# Altium PCB 分电板V2.PcbDoc (part 2 of 2)
Units mil, origin at the board's own origin, x right, y up, seen from the top; angles counter-clockwise.
Board outline 3149.61 x 2362.21 mil, 4 copper layers (Top Layer, GND, POWER, Bottom Layer), stack 23.756 mil thick; 196 components, 158 nets, 590 pads, 320 vias.
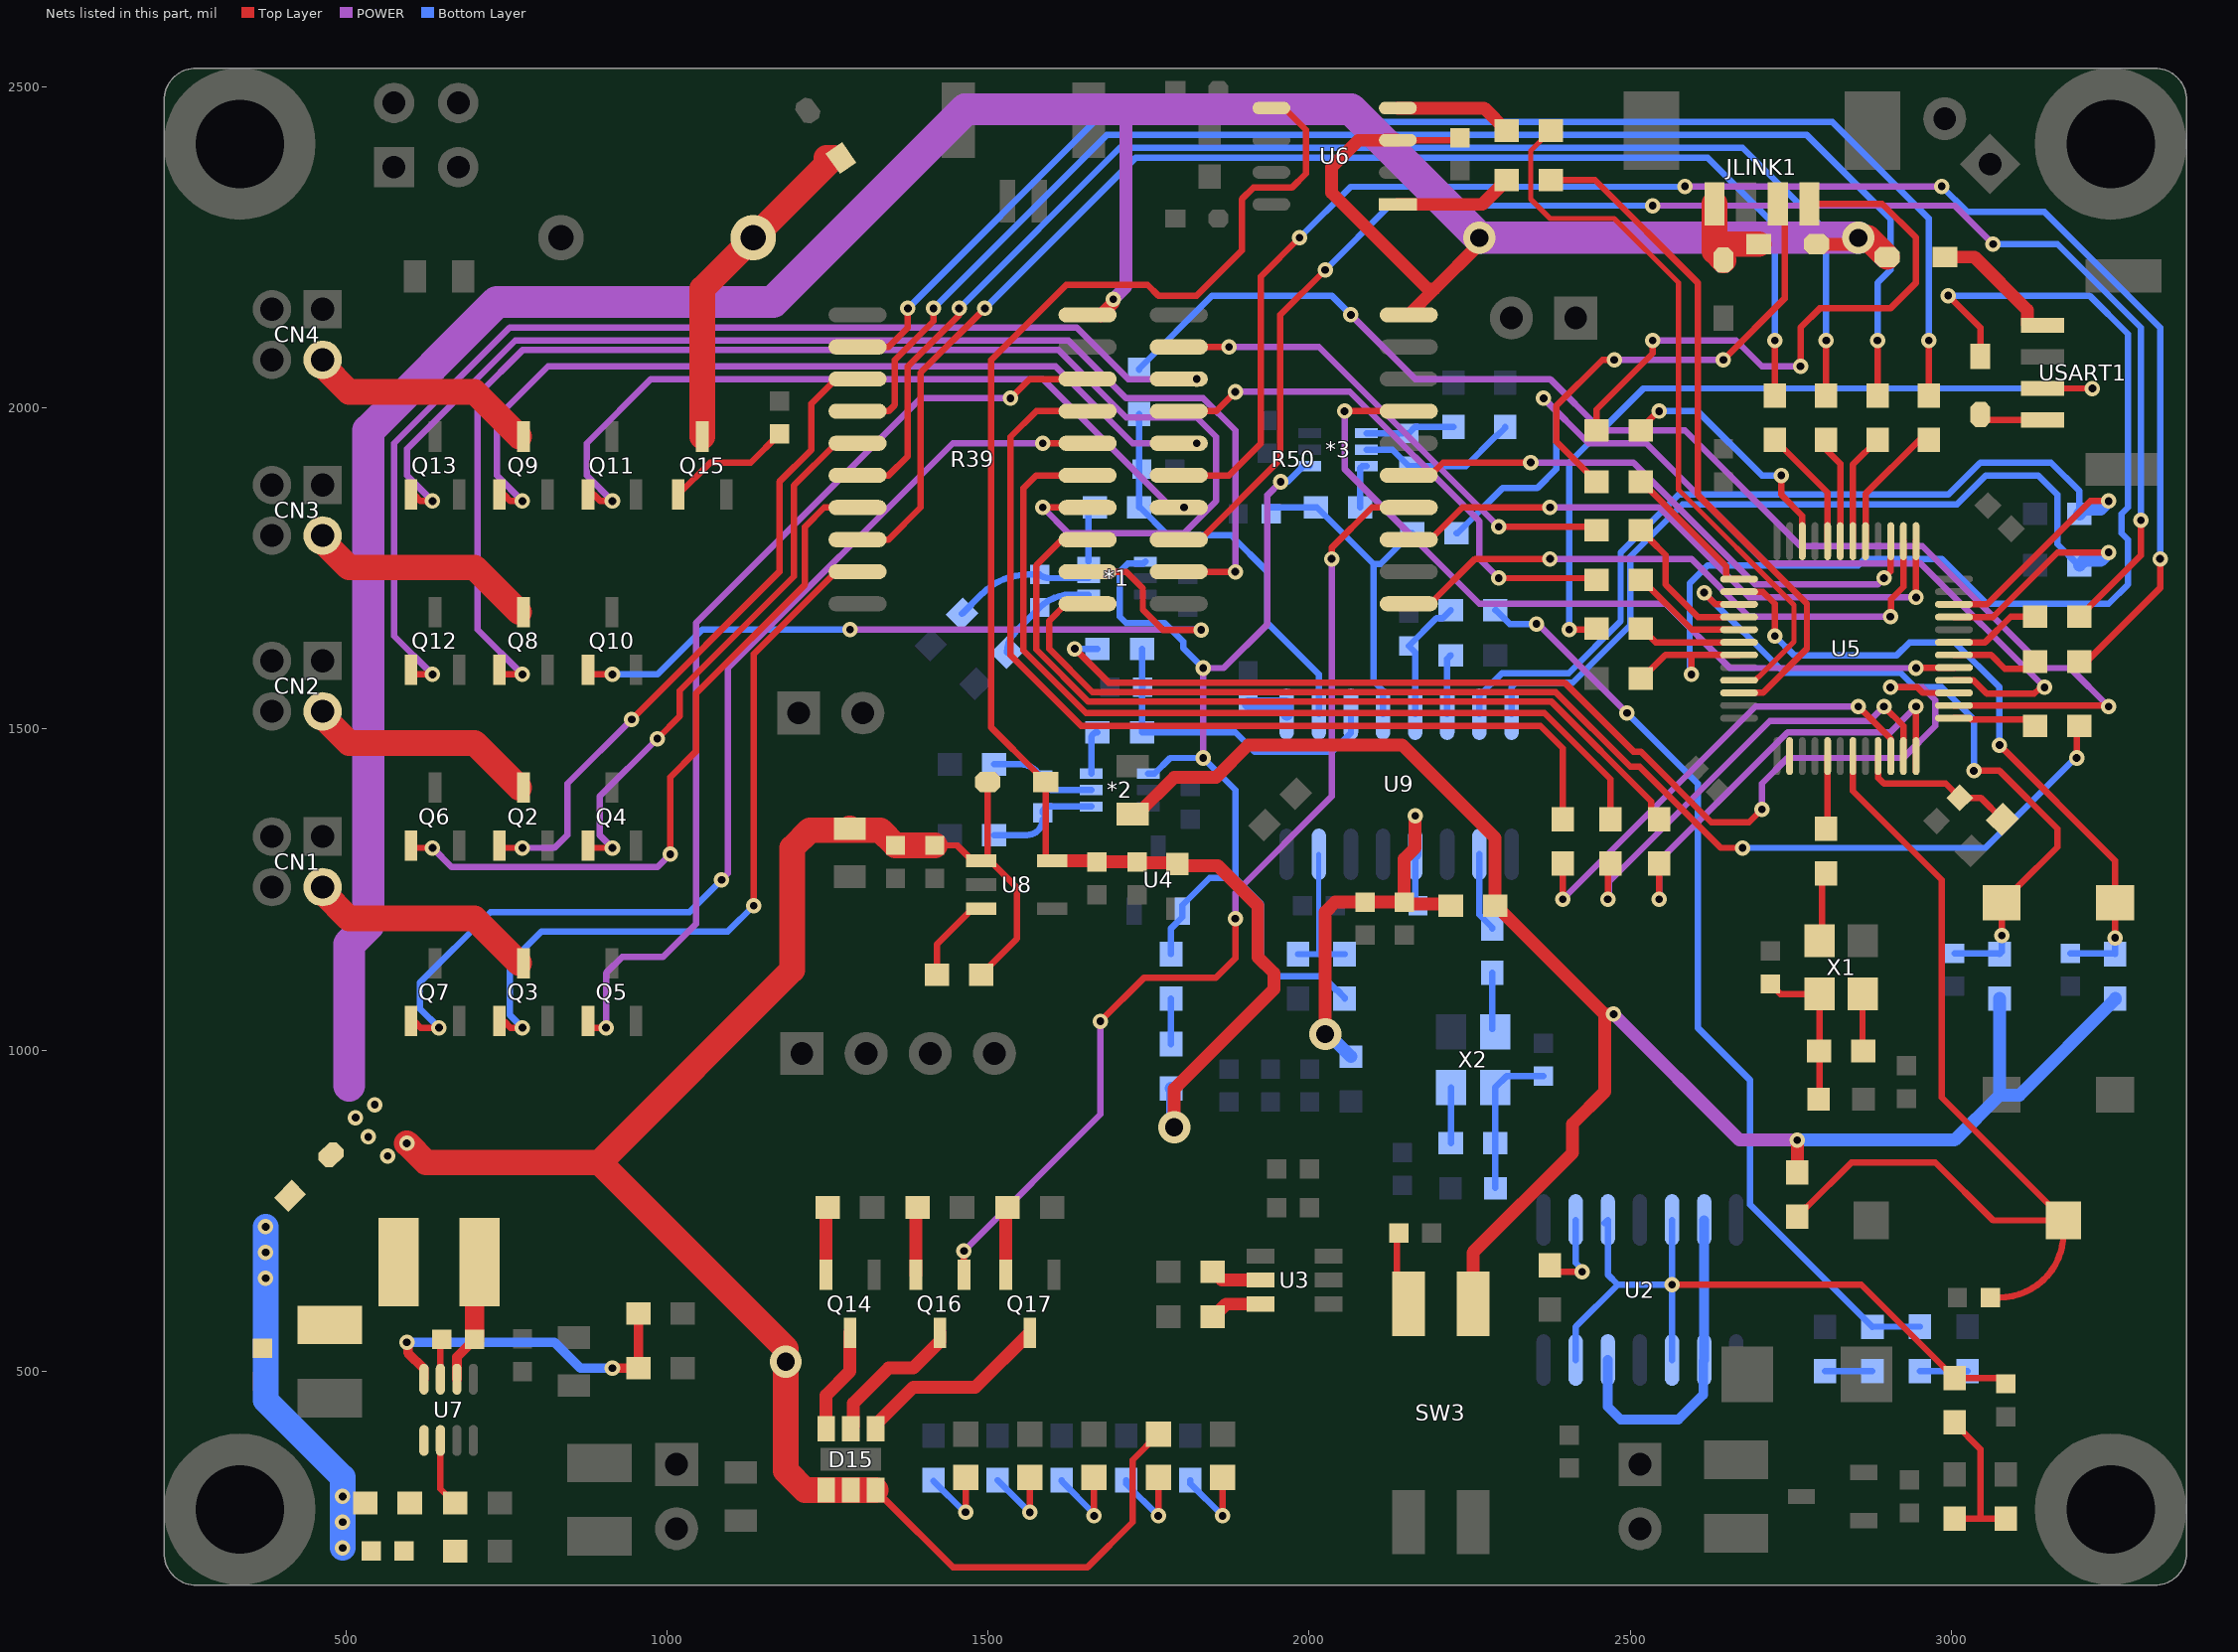
[diagram p4: the nets of this part, all layers, seen from the top]

## Via types
v1: diameter 24, hole 12, Top Layer to Bottom Layer, tented both sides, 277 vias
v2: diameter 34, hole 22, Top Layer to Bottom Layer, tented both sides, 32 vias
v3: diameter 50/50/50 (per signal layer), hole 28, Top Layer to Bottom Layer, tented both sides, 11 vias

## Nets (pads, with @x,y where several pads share a name; then routed paths per layer and width w, separated by ;. In a path a pad name is that pad's centre, name@x,y a point inside that pad or via, vN(x,y) a via of type N, cw(c..) or ccw(c..) an arc to the next point about the centre after c; other vN are vias at no path point) (continued)
MCU3V3: C36.1 C37.1 C38.1 D7.1 L4.2 R9.1 R63.1 R64.2 R65.2 SW3.1 U6.5 U8.5 VDD.1 | length 5214.6
  Top Layer w10: U8.5@1599.71,1295.05 1594.44,1295.05 1589.6,1299.89 D7.1@1589.6,1417.65 1585.66,1417.65 1574.91,1428.4 1574.91,1432.33 1505,1502.25 1505,2075 1621.81,2191.81 1748.19,2191.81 1765,2175 1825,2175 1895,2245 1895,2325 1913,2343 1973,2343 1995,2365 1995,2432.74 1960.82,2466.93 U6.5@1941.13,2466.93 ; VDD.1@2289.5,1225 VDD.1@2302,1212.5
  Top Layer w20: U8.5@1599.71,1295.05 1599.87,1294.89 1669.59,1294.89 1671.24,1293.24 1730.24,1293.24 1731.89,1294.89 1735.16,1291.62 1793.38,1291.62 L4.2@1795,1290 1800,1285 1802.5,1287.5 1857.5,1287.5 1920,1225 1920,1145 1945,1120 1945,1095 1790,940 v3(1790,880) ; C38.1@1725,1367.6 1732.5,1367.6 1789.91,1425 1855,1425 1905,1475 2145,1475 2289.5,1330.5 VDD.1@2289.5,1225 2291,1225 2460,1056 ; SW3.1@2255,605 2255,685 2410,840 2410,885 2460,935 2460,1056 ; v1(2474,1056) 2460,1056 ; R63.1@2752.5,818.5 R63.1@2760,811 ; R63.1@2760,809.5 R63.1@2760,811 ; v1(2760,860) R63.1@2760,811
  POWER w20: v1(2474,1056) 2670,860 v1(2760,860)
  Bottom Layer w20: R9.1@1785,940.5 1787.5,938 1787.5,882.5 v3(1790,880) ; v1(2760,860) 3005,860 3075,930 ; R65.2@3075,1080.5 3075,930 ; R64.2@3255,1080.5 3255,1079 3106,930 3075,930
Net3V3_2: 3V3.2 R33.1 | length 136.2
  Top Layer w10: v1(1865,275) 3V3.2@1865,335
  Bottom Layer w10: R33.1@1815,330.5 1815,325 v1(1865,275)
Net5V_2: 5V.2 R55.1 | length 136.1
  Top Layer w10: v1(1765,275) 5V.2@1765,335
  Bottom Layer w10: R55.1@1715.25,330.5 1715.25,324.75 v1(1765,275)
Net12V_2: 12V.2 R5.2 | length 136.4
  Top Layer w10: v1(1665,275) 12V.2@1665,334.99
  Bottom Layer w10: R5.2@1614.5,330.5 1614.5,329 1665,278.5 v1(1665,275)
Net24_ON_2: 24.2 R11.2 | length 125.8
  Top Layer w10: v1(1565,280.25) 24.2@1565,335
  Bottom Layer w10: R11.2@1514.75,330.5 v1(1565,280.25)
Net48V_2: 48V.2 R26.2 | length 124.6
  Top Layer w10: v1(1465,280.5) 48V.2@1465,335
  Bottom Layer w10: R26.2@1415,329 1463.5,280.5 v1(1465,280.5)
Net*1_4: *1.4 C14.1 R13.1 | length 170.4
  Bottom Layer w10: R13.1@1529.4,1619.4 cw(c1574.54,1619.4) 1542.6,1651.3 C14.1@1580.71,1689.41 cw(c1629,1641.11) 1629,1709.41 *1.4@1656.42,1709.41
Net*1_5: *1.5 C14.2 R12.1 | length 219.6
  Bottom Layer w10: R12.1@1459.4,1679.4 1491.3,1711.3 cw(c1562.01,1640.59) 1562.01,1740.59 C14.2@1580.71,1740.59 ccw(c1594.19,1754.08) 1594.19,1735 *1.5@1656.42,1735
Net*1_6: *1.6 R76.1 | length 88.5
  Bottom Layer w10: *1.6@1656.42,1760.59 1656.42,1835.21 R76.1@1666.21,1845
Net*2_4: *2.4 C15.1 R73.1 | length 170.8
  Bottom Layer w10: R73.1@1509.5,1335 1560.59,1335 ccw(c1560.59,1359.41) C15.1@1585,1359.41 ; C15.1@1585,1369.41 cw(c1595,1369.41) 1595,1379.41 *2.4@1660.71,1379.41
Net*2_5: *2.5 C15.2 R14.1 | length 179.7
  Bottom Layer w10: R14.1@1509.5,1445 1550.58,1445 cw(c1550.58,1410.59) C15.2@1585,1410.59 ; C15.2@1585,1420.59 ccw(c1600.58,1420.59) 1600.58,1405 *2.5@1660.71,1405
Net*2_6: *2.6 R77.1 | length 70
  Bottom Layer w10: *2.6@1660.71,1430.59 1660.71,1485.21 cw(c1670.5,1485.21) R77.1@1670.5,1495
Net*3_4: *3.4 C46.1 R75.1 | length 139.8
  Bottom Layer w10: *3.4@2089.29,1960.59 C46.1@2155,1960.59 2164.91,1970.5 R75.1@2225,1970.5
Net*3_5: *3.5 C46.2 R74.1 | length 252.5
  Bottom Layer w10: *3.5@2089.29,1935 2129.42,1935 C46.2@2155,1909.41 2243.91,1909.41 2291,1956.5 2292.5,1956.5 2305,1969 R74.1@2305,1970.5
Net*3_6: *3.6 R78.1 | length 72.5
  Bottom Layer w10: R78.1@2079.5,1845 2079.5,1906.54 2082.37,1909.41 *3.6@2089.29,1909.41
NetBUZZER1_2: BUZZER1.2 D13.1 Q15.3 | length 530.5
  Top Layer w40: Q15.3@1055,1955.38 1055,2185.79 1129.21,2260 D13.1@1258.35,2389.14 ; 1248.35,2389.14 D13.1@1258.35,2389.14 ; D13.1@1260.81,2389.14 D13.1@1258.35,2389.14
NetC9_2: C9.2 R15.2 R16.1 U7.1
NetC11_2: C11.2 L1.1 R17.2 X1.4 | length 247.4
  Top Layer w10: C11.2@2718.17,1103.16 2733.92,1087.41 2794.7,1087.41 2794.7,925.28 L1.1@2793.17,923.75
NetC18_1: C18.1 L2.1 U7.6 | length 196.9
  Top Layer w15: U7.6@672.8,487.7 672.8,522.21 C18.1@700.59,550
  Top Layer w30: C18.1@700.59,550 700.59,662.6 L2.1@707.99,670
NetC18_2: C18.2 U7.7 | length 63.2
  Top Layer w10: U7.7@647.2,487.7 647.2,547.79 C18.2@649.41,550
NetC25_2: C25.2 L3.1 R27.2 X2.4 | length 239
  Bottom Layer w10: L3.1@2289.45,785.55 X2.4@2289.45,941.69 2307.17,959.41 C25.2@2365,959.41
NetC39_2: C39.2 U9.1 | length 75.7
  Bottom Layer w20: C39.2@1905,1539.41 1963.8,1539.41 1965,1538.21 U9.1@1965,1523.04
NetC50_1: C50.1 R8.1 U9.5 | length 199
  Bottom Layer w10: U9.5@2165,1523.04 2165,1619.4 C50.1@2155,1629.41 2198.09,1672.5 2208,1672.5 R8.1@2220.5,1685
NetD14_2: D14.2 USART1.4 | length 105.8
  Top Layer w10: D14.2@3045,1990 3045,1981.2 USART1.4@3142.01,1981.2
NetD15_2: D15.2 Q17.3 | length 305.3
  Top Layer w20: D15.2@1325,410.67 1325,416.57 1383.43,475 1480,475 Q17.3@1565,560
NetD15_4: D15.4 Q16.3 | length 229.3
  Top Layer w20: D15.4@1286.42,410.67 1290.2,414.45 1290.2,450.2 1345,505 1383.46,505 1425,546.54 Q16.3@1425,560
NetD15_6: D15.6 Q14.3 | length 164.7
  Top Layer w20: D15.6@1247.83,410.67 1247.83,462.89 1285,500.06 Q14.3@1285,560
NetJLINK1_1: JLINK1.1 R42.2 | length 949.9
  Top Layer w10: R42.2@2447.5,1965 2447.5,1997.5 2535,2085 v1(2535,2105) ; v1(2765,2065) 2765,2125 2795,2155 2905,2155 2945,2195 2945,2265 2892.09,2317.91 JLINK1.1@2778.82,2317.91
  POWER w10: v1(2535,2105) 2665,2105 2705,2065 v1(2765,2065)
NetJLINK1_2: JLINK1.2 R38.2 | length 721.6
  Top Layer w10: R38.2@2447.5,1885 2446,1885 2433.5,1897.5 2433.5,1899 2385,1947.5 2385,2003.18 2456.82,2075 v1(2475,2075) ; v1(2645,2075) 2740.36,2170.36 2740.36,2307.17 JLINK1.2@2729.61,2317.91
  POWER w10: v1(2475,2075) v1(2645,2075)
NetQ14_2: Q14.2 R66.2 | length 106.2
  Top Layer w20: Q14.2@1247.6,650 1247.76,650.16 1247.76,752.26 R66.2@1250.5,755
NetQ15_1: Q15.1 R_BEEP.2 | length 196.3
  Top Layer w10: Q15.1@1017.6,1865.38 1067.22,1915 1130.58,1915 R_BEEP.2@1175,1959.41
NetQ16_2: Q16.2 R67.2 | length 106.2
  Top Layer w20: Q16.2@1387.6,650 1387.76,650.16 1387.76,752.26 R67.2@1390.5,755
NetQ17_2: Q17.2 R68.2 | length 106.2
  Top Layer w20: Q17.2@1527.6,650 1527.76,650.16 1527.76,752.26 R68.2@1530.5,755
NetR4_2: R4.2 U2.2 | length 138.8
  Top Layer w10: R4.2@2375,665 2385,655 v1(2425,655)
  Bottom Layer w10: U2.2@2415,735.56 2415,668.79 2425,658.79 v1(2425,655)
NetR6_2: R6.2 U3.2 | length 79.9
  Top Layer w20: R6.2@1849.5,655 1851,655 1863.98,642.02 U3.2@1924.04,642.02
NetR7_2: R7.2 U3.3 | length 82.7
  Top Layer w20: R7.2@1849.5,585 1851,585 1870.62,604.62 U3.3@1924.04,604.62
NetR8_2: R8.2 R51.2 R53.2 | length 1460.2
  POWER w10: v1(2353.75,1663.75) 2356.25,1663.75 v1(2495,1525)
  Bottom Layer w10: R8.2@2289.5,1685 2291,1685 2312.25,1663.75 v1(2353.75,1663.75) ; v1(2495,1525) 2605,1415 2605,1035 2686.8,953.2 2686.8,759.2 R53.2@2877,569 2877.5,569.5 R51.2@2951,569.5
NetR9_2: R9.2 R10.1 | length 71
  Bottom Layer w10: R9.2@1785,1009.5 R10.1@1785,1080.5
NetR17_1: R17.1 X1.1 | length 89.1
  Top Layer w10: X1.1@2861.63,1087.41 2861.63,999.78 R17.1@2862.67,998.75
NetR18_2: R18.2 R19.1 U7.8 | length 530.4
  Top Layer w15: v1(595,545) 596.72,543.28 596.72,528.78 621.6,503.9 U7.8@621.6,487.7 ; v1(915,505) R19.1@955.5,505 R18.2@955.5,590
  Bottom Layer w15: v1(595,545) 825,545 865,505 v1(915,505)
NetR20_2: R20.2 U6.1 | length 185.3
  Top Layer w20: U6.1@2137.98,2316.93 2269.43,2316.93 R20.2@2307.5,2355
NetR21_1: R21.1 X1.3 | length 96.2
  Top Layer w10: X1.3@2794.7,1170.09 2793.67,1171.12 2798.67,1176.12 R21.1@2798.67,1263.75
NetR24_2: R24.2 U6.4 | length 184
  Top Layer w20: U6.4@2137.98,2466.93 2272.46,2466.93 R24.2@2307.5,2431.88
NetR25_1: R25.1 U7.2 | length 107.8
  Top Layer w10: U7.2@647.2,392.3 647.2,316.8 669,295 R25.1@670.5,295
NetR27_1: R27.1 X2.1 | length 86.6
  Bottom Layer w10: R27.1@2220.55,855.05 X2.1@2220.55,941.69
NetR29_1: R29.1 X2.3 | length 87.7
  Bottom Layer w10: X2.3@2285,1032.76 R29.1@2285,1120.5
NetR35_2: R35.2 R35B.1 U9.15 | length 229.4
  Bottom Layer w8: U9.15@2015,1305 2015,1153.38 2018.88,1149.5
  Bottom Layer w10: R35B.1@1982.75,1149.5 2018.88,1149.5 R35.2@2055,1149.5
NetR41_2: R41.2 U8.3 | length 139.4
  Top Layer w10: R41.2@1420.1,1117.65 1420.1,1164.64 1475.7,1220.25 U8.3@1489.48,1220.25
NetR48_1: R48.1 R51.1 | length 74
  Bottom Layer w10: R51.1@2951,500.5 R48.1@3025,500.5
NetR53_1: R53.1 R56.1 | length 74
  Bottom Layer w10: R56.1@2803,500 R53.1@2877,500
NetR58_2: R58.2 U9.6 | length 94.2
  Bottom Layer w10: U9.6@2215,1523.04 2215,1609.5 R58.2@2220.5,1615
NetR70_1: R70.1 SW3.2 | length 69.7
  Top Layer w10: SW3.2@2136.69,647.99 R70.1@2136.69,717.71
NetR72_1: R72.1 USART1.3 | length 1243.2
  Top Layer w10: v1(2405,1655) 2445.85,1655 R72.1@2447.5,1656.65 ; USART1.3@3142.01,2030.39 v1(3219.6,2030.39)
  Bottom Layer w10: v1(2405,1655) 2405,1915 2520.4,2030.39 v1(3219.6,2030.39)
NetU2_6: U2.6 U2.9 U2.12 | length 517.9
  Bottom Layer w15: U2.12@2465,517.52 2465,445 2485,425 2575,425 2613.55,463.55 2613.55,516.07 U2.9@2615,517.52 U2.6@2615,735.56
NRST: C44.1 R63.2 RST1.1 U5.7 | length 1546.3
  Top Layer w10: R63.2@2760,740.5 2760,742 2772.5,754.5 2774,754.5 2844.5,825 2975,825 3065,735 RST1.1@3174.6,735 ; U5.7@2846.58,1457.91 2846.58,1403.42 2985,1265 2985,926.57 3174.6,736.97 RST1.1@3174.6,735 ; C44.1@3060.59,615 3074.6,615 ccw(c3074.6,715) 3174.6,715 RST1.1@3174.6,735 ; RST1.1@3180.1,729.5 cw(c3180.1,735) RST1.1@3174.6,735
OSC_8M: R29.2 U9.10 | length 123.8
  Bottom Layer w10: U9.10@2265,1305 2265,1211 2285,1191 R29.2@2285,1189.5
OSC_12M: R21.2 U5.5 | length 114.7
  Top Layer w10: R21.2@2805,1344.5 ccw(c2805,1346.71) 2807.21,1346.71 U5.5@2807.21,1457.91
PA0: R44.1 U5.10 | length 738.1
  Top Layer w10: v1(2395,1235) R44.1@2395,1290.5 ; v1(2855,1535) 2855.43,1535 2905.64,1484.8 U5.10@2905.64,1457.91
  POWER w10: v1(2395,1235) 2695,1535 v1(2855,1535)
PA1: R45.1 U5.11 | length 715.7
  Top Layer w10: v1(2465,1235) 2465,1286.43 R45.1@2469.07,1290.5 ; v1(2895,1535) 2925.32,1504.68 U5.11@2925.32,1457.91
  POWER w10: v1(2465,1235) 2467,1237 2467,1262 2717.5,1512.5 2872.5,1512.5 v1(2895,1535)
PA2: R47.1 U5.12 | length 716.2
  Top Layer w10: v1(2545,1235) R47.1@2545,1290.5 ; U5.12@2945.01,1433.7 U5.12@2945.01,1457.91 v1(2945,1535)
  POWER w10: v1(2545,1235) 2545,1295 2745,1495 2905,1495 v1(2945,1535)
PA3: R49.1 U5.13 | length 127.3
  Top Layer w10: U5.13@3004.06,1516.96 3028.44,1516.96 3030.4,1515 R49.1@3130.5,1515
PA4: R30.1 U5.14 | length 2064.8
  Top Layer w10: U5.14@3004.06,1536.65 v1@3245,1536.65
  POWER w10: v1(2065,2145) 2165,2045 2375,2045 2455,1965 2585,1965 2765,1785 2955,1785 3145,1595 3185,1595 v1(3245,1535)
  Bottom Layer w10: R30.1@1735,2059.5 1735,2061 1849,2175 2035,2175 v1(2065,2145)
PA5: R32.1 U5.15 | length 1793.8
  Top Layer w10: v1(1635,1625) 1687.5,1572.5 2397.5,1572.5 2505,1465 2516.21,1465 2626.21,1355 2685,1355 v1(2705,1375) ; v1(2905,1565) 2946.82,1565 2955.49,1556.33 U5.15@3004.06,1556.33
  POWER w10: v1(2705,1375) 2705,1415 2745,1455 2925,1455 2975,1505 2975,1545 2955,1565 v1(2905,1565)
  Bottom Layer w10: v1(1635,1625) R32.1@1670.5,1625
PA6: R37.1 U5.16 | length 1440.5
  Top Layer w10: U5.16@3004.06,1576.02 3004.18,1575.9 3034.1,1575.9 3055,1555 3129.02,1555 3136.34,1562.32 3138.53,1562.32 3139.02,1562.81 3139.02,1565 v1(3145,1565) v1@3145,1568.79
  POWER w10: v1(2365,2015) 2435,1945 2525,1945 2712.5,1757.5 2952.5,1757.5 v1(3145,1565)
  Bottom Layer w10: R37.1@2229.5,1805 2231,1805 2301,1875 2355,1875 2385,1905 2385,1995 v1(2365,2015)
PA7: R50.17 U5.17 | length 1267.8
  Top Layer w10: v1(2055,1995) R50.17@2155,1995 ; v1(2945,1595) 2945.58,1595.58 3003.93,1595.58 U5.17@3004.06,1595.7
  POWER w10: v1(2055,1995) 2055,1905 2265,1695 2555,1695 2655,1595 v1(2945,1595)
PA8: R31.1 U5.29 | length 207.3
  Top Layer w10: U5.29@2866.27,1792.55 2866.39,1792.67 2866.39,1866.39 2950.5,1950.5 R31.1@2965,1950.5
PA9: R36.1 U5.30 | length 173.9
  Top Layer w10: U5.30@2846.58,1792.55 2846.58,1912.08 R36.1@2885,1950.5
PA10: R40.1 U5.31 | length 167
  Top Layer w10: R40.1@2805,1950.5 2805,1935 2826.9,1913.1 U5.31@2826.9,1792.55
PA11: R43.1 U5.32 | length 192
  Top Layer w10: R43.1@2725,1950.5 2807.21,1868.29 U5.32@2807.21,1792.55
PA13_SWDIO: R42.1 U5.34 | length 391.4
  Top Layer w10: R42.1@2516.5,1965 2515,1966.5 2543.5,1995 v1(2544.94,1995) ; v1(2735,1895) 2735,1865 2767.84,1832.16 U5.34@2767.84,1792.55
  Bottom Layer w10: v1(2544.94,1995) 2605,1995 2705,1895 v1(2735,1895)
PA14_SWCLK: R38.1 U5.37 | length 228.8
  Top Layer w10: R38.1@2516.5,1886.3 2518,1886.3 2530.5,1873.8 2530.5,1872.42 2649.1,1753.82 2649.1,1733.79 2649.39,1733.5 U5.37@2669.42,1733.5
PA15: C43.1 R64.1 SW1.1 U5.38 | length 1073.6
  Top Layer w10: U5.38@2669.42,1713.81 2669.54,1713.69 2706.31,1713.69 2725,1695 v1(2725,1645) ; v1(3075,1475) 3255,1295 SW1.1@3255,1229.76 v1(3255,1175)
  Bottom Layer w10: v1(2725,1645) 2755,1615 2915,1615 2935,1635 3005,1635 3075,1565 v1(3075,1475) ; C43.1@3185,1150.59 3253.91,1150.59 R64.1@3255,1149.5 v1(3255,1175)
PB0: R57.1 U5.18 | length 135.3
  Top Layer w10: U5.18@3004.06,1615.39 3061.77,1615.39 3083.16,1594 R57.1@3130.5,1594
PB1: R59.1 U5.19 | length 143
  Top Layer w10: U5.19@3004.06,1635.07 3052.5,1635.07 3092.43,1675 R59.1@3130.5,1675
PB3: C42.1 R65.1 SW2.1 U5.39 | length 1116
  Top Layer w10: v1(2615,1712.37) 2633.24,1694.13 U5.39@2669.42,1694.13 ; v1(3035,1435) 3075,1435 3165,1345 3165,1316.39 3102.89,1254.29 3102.89,1252.32 3080.34,1229.76 SW2.1@3078.37,1229.76 v1(3078.37,1178.37)
  Bottom Layer w10: v1(2615,1712.37) 2739.87,1587.5 2920.68,1587.5 2943.18,1565 2985,1565 3035,1515 v1(3035,1435) ; C42.1@3005,1150.59 R65.1@3076.09,1150.59 ; R65.1@3075,1149.5 R65.1@3076.09,1150.59 ; v1(3078.37,1178.37) 3078.37,1152.87 R65.1@3076.09,1150.59
PB4: R52.1 U5.40 | length 236.6
  Top Layer w10: R52.1@2516.5,1809.42 2518,1809.42 2530.5,1796.92 2530.5,1795.42 2555,1770.92 2555,1725 2605.56,1674.44 U5.40@2669.42,1674.44
PB5: R54.1 U5.41 | length 185.1
  Top Layer w10: R54.1@2516.5,1732.54 2518,1732.54 2595.78,1654.76 U5.41@2669.42,1654.76
PB8_CAN_RX: R24.1 U5.45 | length 1148.6
  Top Layer w8: R24.1@2376.5,2431.88 2375,2431.88 2361.5,2418.38 2361.5,2416.88 2345,2400.38 2345,2325 2375,2295 2475,2295 2575,2195 2575,1873.08 2755,1693.08 2755,1636.12 2699.76,1580.88 2699.2,1580.88 2694.34,1576.02 U5.45@2669.42,1576.02
PB9_CAN_TX: R20.1 U5.46 | length 1069.4
  Top Layer w10: R20.1@2376.5,2355 2445,2355 2605,2195 2605,1865 2775,1695 2775,1625 2706.45,1556.45 2669.54,1556.45 U5.46@2669.42,1556.33 U5.46@2669.29,1556.21
PB12: R50.13 U5.25 | length 956.3
  Top Layer w10: R50.13@2155,1795 2188.46,1795 2238.46,1845 v1(2375,1845) ; v1(2945,1705) U5.25@2945.01,1792.55
  POWER w10: v1(2375,1845) 2545,1845 2685,1705 v1(2945,1705)
PB13: R50.11 U5.26 | length 942.2
  Top Layer w10: R50.11@2155,1695 2188.46,1695 2258.46,1765 v1(2375,1765) ; v1(2905,1675) 2905.97,1675.97 2905.97,1702 2925.32,1721.34 U5.26@2925.32,1792.55
  POWER w10: v1(2375,1765) 2595,1765 2685,1675 v1(2905,1675)
PB14: R50.15 U5.27 | length 893.1
  Top Layer w10: R50.15@2155,1895 2188.46,1895 2208.46,1915 v1(2345,1915) ; v1(2895,1735) 2905.51,1745.51 2905.51,1792.43 U5.27@2905.64,1792.55
  POWER w10: v1(2345,1915) 2505,1915 2695,1725 2885,1725 v1(2895,1735)
PC13: U5.2
R_A: CN2.3 Q2.3 | length 352.3
  Top Layer w40: CN2.3@463.74,1519.59 505,1478.33 700.45,1478.33 Q2.3@770.07,1408.71
R_B: CN1.3 Q3.3 | length 352.3
  Top Layer w40: CN1.3@463.74,1246.26 505,1205 700.45,1205 Q3.3@770.07,1135.38
R_C: CN3.3 Q8.3 | length 352.3
  Top Layer w40: CN3.3@463.74,1792.93 505,1751.67 700.45,1751.67 Q8.3@770.07,1682.04
R_D: CN4.3 Q9.3 | length 361
  Top Layer w40: CN4.3@463.74,2075 463.74,2066.26 505,2025 700.45,2025 Q9.3@770.07,1955.38
RED: Q16.1 R50.14 | length 1580.9
  Top Layer w10: Q16.1@1462.4,650 v1(1462.4,687.6) ; v1(1675,1045) 1742.5,1112.5 1854.32,1112.5 1885,1143.18 v1(1885,1205) ; v1(2035,1765) 2035,1782.24 2097.76,1845 R50.14@2155,1845
  POWER w10: v1(1462.4,687.6) 1675,900.2 v1(1675,1045) ; v1(1885,1205) 1885,1245 2035,1395 v1(2035,1765)
SCL: R62.2 U5.21 U9.8 | length 1565.3
  Top Layer w10: U5.21@3004.06,1674.44 3064.44,1674.44 3165,1775 v1(3245,1775)
  Bottom Layer w10: U9.8@2315,1523.04 2315,1565 2322,1572 2410.18,1572 2500,1661.82 2500,1768.79 2581.21,1850 3008.7,1850 3053.7,1895 3135,1895 3165,1865 3165,1788 3198,1755 R62.2@3199.5,1755
  Bottom Layer w20: R62.2@3199.5,1755 3207,1762.5 3232.5,1762.5 v1(3245,1775)
SDA: R61.2 U5.22 U9.7 | length 1591.7
  Top Layer w10: U5.22@3004.06,1694.13 3055.34,1694.13 3216.21,1855 v1(3245,1855)
  Bottom Layer w10: U9.7@2265,1523.04 2265,1551.86 2300.14,1587 2403.97,1587 2485,1668.03 2485,1775 2575,1865 2995,1865 3045,1915 3155,1915 3199.5,1870.5 3199.5,1842.5 R61.2@3199.5,1835
  Bottom Layer w20: R61.2@3199.5,1835 3207,1842.5 3232.5,1842.5 v1(3245,1855)
TIM1_CH1: Q2.1 R39.3 | length 1023.7
  Top Layer w10: Q2.1@746.28,1315 v1(775,1315) ; v1(945,1515) 1175,1745 1175,1885 1225,1935 1225,2006.72 1263.28,2045 R39.3@1296.74,2045
  POWER w10: v1(775,1315) 825,1315 845,1335 845,1415 v1(945,1515)
TIM1_CH1_IN: R31.2 R39.2 | length 2172.2
  Top Layer w10: R39.2@1296.74,2095 1345,2095 1375,2125 v1(1375,2155) v1@1375,2158.79 ; R31.2@2965,2019.5 v1(2965,2105)
  Bottom Layer w10: v1(1375,2155) 1665,2445 2815,2445 2965,2295 v1(2965,2105)
TIM1_CH2: Q4.1 R39.5 | length 853
  Top Layer w10: Q4.1@886.28,1315 v1(915,1315) ; v1(985,1485) 1020,1520 1020,1560 1197.83,1737.83 1197.83,1879.56 1263.28,1945 R39.5@1296.74,1945
  POWER w10: v1(915,1315) 895,1335 895,1395 v1(985,1485)
TIM1_CH2_IN: R36.2 R39.4 | length 2176.7
  Top Layer w10: R39.4@1296.74,1995 1345,1995 1355,2005 1355,2075 1415,2135 v1(1415,2155) ; R36.2@2885,2019.5 v1(2885,2105)
  Bottom Layer w10: v1(1415,2155) 1685,2425 2775,2425 2905,2295 2905,2215 2885,2195 v1(2885,2105)
TIM1_CH3: Q6.1 R39.7 | length 1110.6
  Top Layer w10: Q6.1@606.28,1315 v1(635,1315) ; v1(1005,1305) 1005,1425 1045,1465 1045,1555 1215,1725 1215,1815 1245,1845 R39.7@1296.74,1845
  POWER w10: v1(635,1315) 665,1285 985,1285 v1(1005,1305)
TIM1_CH3_IN: R39.6 R40.2 | length 2116.7
  Top Layer w10: R39.6@1296.74,1895 1345,1895 1375,1925 1375,2065 1455,2145 v1(1455,2155) ; R40.2@2805,2019.5 v1(2805,2105)
  Bottom Layer w10: v1(1455,2155) 1705,2405 2675,2405 2805,2275 v1(2805,2105)
TIM1_CH4: Q3.1 R39.9 | length 1165
  Top Layer w10: Q3.1@746.28,1045 756.28,1035 v1(775,1035) ; v1(1135,1225) 1135,1616.72 1263.28,1745 R39.9@1296.74,1745
  Bottom Layer w10: v1(775,1035) 755,1055 755,1135 805,1185 1095,1185 v1(1135,1225)
TIM1_CH4_IN: R39.8 R43.2 | length 2106.2
  Top Layer w10: R39.8@1296.74,1795 1345,1795 1395,1845 1395,2055 v1(1495,2155) ; R43.2@2725,2019.5 v1(2725,2105)
  Bottom Layer w10: v1(1495,2155) 1729.43,2389.43 2620.57,2389.43 2725,2285 v1(2725,2105)
TIM2_CH1: Q5.1 R39.18 | length 1521.4
  Top Layer w10: Q5.1@876.28,1035 v1(905,1035) ; v1(1535,2015) 1565,2045 R39.18@1655,2045
  POWER w10: v1(905,1035) 905,1120 930,1145 993.7,1145 1045,1196.3 1045,1665 1395,2015 v1(1535,2015)
TIM2_CH1_IN: R39.17 R44.2 | length 1507.1
  Top Layer w10: R39.17@1655,1995 1575,1995 1535,1955 1535,1615 1645,1505 2360,1505 2395,1470 R44.2@2395,1359.5
TIM2_CH2: Q7.1 R39.16 | length 1700.7
  Top Layer w10: Q7.1@606.28,1045 616.28,1035 v1(645,1035) ; v1(1585,1945) R39.16@1655,1945
  POWER w10: v1(1085,1265) 1095,1275 1095,1595 1445,1945 v1(1585,1945)
  Bottom Layer w10: v1(645,1035) 615,1065 615,1105 725,1215 1035,1215 v1(1085,1265)
TIM2_CH2_IN: R39.15 R45.2 | length 1420.4
  Top Layer w10: R39.15@1655,1895 1575,1895 1555,1875 1555,1622.57 1652.57,1525 2366.21,1525 2469.07,1422.14 R45.2@2469.07,1359.5
TIM2_CH3: Q8.1 R39.14 | length 2204.9
  Top Layer w10: Q8.1@746.28,1585 v1(775,1585) ; v1(1585,1845) R39.14@1655,1845
  POWER w10: v1(775,1585) 705,1655 705,2020 775,2090 1610,2090 1715,1985 1825,1985 1855,1955 1855,1855 1805,1805 1625,1805 v1(1585,1845)
TIM2_CH3_IN: R39.13 R47.2 | length 1316.3
  Top Layer w10: R39.13@1655,1795 1615,1795 1575,1755 1575,1623.79 1656.29,1542.5 2377.5,1542.5 2532.5,1387.5 2532.5,1372 R47.2@2545,1359.5
TIM2_CH4: Q10.1 R39.12 | length 1208.7
  Top Layer w10: Q10.1@886.28,1585 v1(915,1585) ; R39.12@1655,1745 1715,1745 1740.96,1719.04 1740.96,1685.76 1772.35,1654.38 v1(1831.84,1654.38)
  POWER w10: v1(1285,1655) 1831.21,1655 v1(1831.84,1654.38)
  Bottom Layer w10: v1(915,1585) 985,1585 1055,1655 v1(1285,1655)
TIM2_CH4_IN: R39.11 R49.2 | length 1962.7
  Top Layer w10: R39.11@1655,1695 1621.54,1695 1595,1668.46 1595,1625 1662.5,1557.5 2383.71,1557.5 2499.87,1441.34 2514.51,1441.34 2640.85,1315 v1(2675,1315) ; v1(3195,1455) 3195,1510.5 R49.2@3199.5,1515
  Bottom Layer w10: v1(2675,1315) 3053.18,1315 3193.18,1455 v1(3195,1455)
TIM3_CH1: Q12.1 R50.3 | length 1808.6
  Top Layer w10: Q12.1@601.43,1592.04 601.43,1589.84 606.28,1585 v1(635,1585) ; R50.3@1796.74,2045 v1(1825,2045)
  POWER w10: v1(635,1585) 575,1645 575,1945 755,2125 1638.11,2125 1718.11,2045 v1(1825,2045)
TIM3_CH1_IN: R50.2 R52.2 | length 769.1
  Top Layer w10: R50.2@1796.74,2095 v1(1875,2095) ; v1(2295,1815) 2441.92,1815 R52.2@2447.5,1809.42
  POWER w10: v1(1875,2095) 2015,2095 v1(2295,1815)
TIM3_CH2: Q9.1 R50.5 | length 1380.5
  Top Layer w10: Q9.1@746.28,1865 756.28,1855 v1(775,1855) ; R50.5@1796.74,1945 v1(1825,1945)
  POWER w10: v1(775,1855) 735,1895 735,1985 815,2065 1605,2065 1725,1945 v1(1825,1945)
TIM3_CH2_IN: R50.4 R54.2 | length 819.3
  Top Layer w10: R50.4@1796.74,1995 1855,1995 v1(1885,2025) ; v1(2295,1735) 2445.04,1735 R54.2@2447.5,1732.54
  POWER w10: v1(1885,2025) 1885.59,2025.59 2063.2,2025.59 2265,1823.79 2265,1765 v1(2295,1735)
TIM3_CH3: Q11.1 R50.7 | length 1202
  Top Layer w10: Q11.1@886.28,1865 896.28,1855 v1(915,1855) ; R50.7@1796.74,1845 v1(1805,1845)
  POWER w10: v1(915,1855) 875,1895 875,1945 975,2045 1585,2045 1785,1845 v1(1805,1845)
TIM3_CH3_IN: R50.6 R57.2 | length 2542
  Top Layer w10: R50.6@1796.74,1895 1875,1895 1925,1945 1925,2205 v1(1985,2265) ; R57.2@3199.5,1594 3201,1594 3213.5,1606.5 3213.5,1608 3325,1719.5 v1(3325,1765)
  POWER w10: v1(2585,2345) v1(2985,2345)
  Bottom Layer w10: v1(1985,2265) 2064.43,2344.43 2584.43,2344.43 v1(2585,2345) ; v1(2985,2345) 3025,2305 3145,2305 3325,2125 v1(3325,1765)
TIM4_CH4: Q13.1 R50.9 | length 1856.8
  Top Layer w10: Q13.1@606.28,1865 616.28,1855 v1(635,1855) ; R50.9@1796.74,1745 v1(1885,1745)
  POWER w10: v1(635,1855) 595,1895 595,1936.21 763.79,2105 1625,2105 1715,2015 1835,2015 1885,1965 v1(1885,1745)
TIM4_CH4_IN: R50.8 R59.2 | length 2414.7
  Top Layer w10: R50.8@1796.74,1795 1830.2,1795 1955,1919.8 1955,2145 v1(2025,2215) ; R59.2@3199.5,1675 3201,1675 3213.5,1687.5 3213.5,1689 3295,1770.5 v1(3295,1825)
  POWER w10: v1(2535,2315) 3005,2315 v1(3065,2255)
  Bottom Layer w10: v1(2025,2215) 2125,2315 v1(2535,2315) ; v1(3065,2255) 3165,2255 3295,2125 v1(3295,1825)
UA: C6.1 R30.2 R76.2 U9.2 | length 641.9
  Bottom Layer w10: R30.2@1735,1990.5 1735.21,1990.29 R76.2@1735.21,1845 1736.71,1845 1779.8,1801.91 1878.09,1801.91 1935,1745 1935,1665 2015,1585 U9.2@2015,1523.04
UB: C7.1 R32.2 R77.2 U9.3 | length 510.1
  Bottom Layer w10: R32.2@1739.5,1625 1739.5,1566.09 ccw(c1740.59,1566.09) C7.1@1740.59,1565 ccw(c1740.59,1563.9) 1739.5,1563.9 R77.2@1739.5,1495 1885,1495 1915,1465 2035.78,1465 2065,1494.22 U9.3@2065,1523.04
UC: C8.1 R37.2 R78.2 U9.4 | length 516.4
  Bottom Layer w10: C8.1@1940.6,1845 R78.2@2010.5,1845 2012,1845 2100,1757 ; U9.4@2115,1523.04 2115,1560 2100,1575 2100,1757 ; R37.2@2160.5,1805 2159,1805 2111,1757 2100,1757
USART1_RX: D14.1 R71.1 U5.43 | length 1899.8
  Top Layer w10: R71.1@2516.5,1578.77 2518,1578.77 2554.62,1615.39 2595,1615.39 ; v1(2595,1585) 2595,1615.39 ; U5.43@2669.42,1615.39 2595,1615.39 ; v1(2995,2175) 3045,2125 D14.1@3045,2080
  Bottom Layer w10: v1(2595,1585) 2592.5,1587.5 2592.5,1726.64 2620.86,1755 2855,1755 2865,1765 2985,1765 3055,1695 3245,1695 3275,1725 3275,1795 3265,1805 3265,1835 3275,1845 3275,2115 3215,2175 v1(2995,2175)
USART1_TX: R72.2 U5.42 | length 161.9
  Top Layer w10: R72.2@2516.5,1656.65 2518,1656.65 2539.58,1635.07 U5.42@2669.42,1635.07
VCC5V: 5V.1 C17.2 C28.1 C34.1 C35.1 D7.2 D10.2 D12.2 D15.1 D15.3 D15.5 D16.2 R39.20 R41.1 R50.20 U6.3 U8.1 | length 7794.9
  Top Layer w10: D15.1@1325,315 1325,309.09 1333.78,300.31 1339.68,300.31 1445,195 1655,195 1725,265 1725,361.93 5V.1@1765,401.93 ; C28.1@1417.01,1318.9 1451.85,1318.9 1475.7,1295.05 U8.1@1489.48,1295.05 U8.1@1494.75,1295.05 ; R41.1@1489.1,1117.65 1490.6,1117.65 1503.1,1130.15 1503.1,1131.65 1545,1173.55 1545,1253.31 1503.26,1295.05 U8.1@1494.75,1295.05 ; D7.2@1499.6,1417.65 1499.6,1299.89 U8.1@1494.75,1295.05 ; U6.3@2137.98,2416.93 2231.34,2416.93 C17.2@2235,2420.59
  Top Layer w20: R39.20@1655,2145 1655.69,2145.69 1675,2145.69 1675,2143.61 1695,2163.61 v1(1695,2169.31) ; U6.3@2118.61,2416.93 U6.3@2137.98,2416.93 2137.82,2416.77 2076.77,2416.77 2035,2375 2035,2335 2185,2185 2195,2185 ; R50.20@2155,2145 2195,2185 ; v3(2265,2265) 2265,2255 2195,2185 ; D12.2@2790,2255 2860,2255 v3@2870,2265
  Top Layer w40: v1(595,855) 625,825 895,825 ; D15.1@1325,315 D15.3@1286.42,315 D15.5@1247.83,315 1215,315 1185,345 v3(1185,515) 1185,535 895,825 ; C28.1@1417.01,1318.9 C34.1@1355.82,1318.9 1332.17,1342.55 1287.09,1342.55 C35.1@1284.59,1345.05 1282.09,1342.55 1222.55,1342.55 1195,1315 1195,1125 895,825 ; v3@2870,2265 D16.2@2900,2235
  POWER w20: v1(1695,2169.31) 1715,2189.31 1715,2465
  POWER w50: 505,945 505,1165 535,1195 535,1965 735,2165 1165,2165 1465,2465 1715,2465 2065,2465 v3(2265,2265) v3(2855,2265)
  other v1: 565,835 535,865 515,895 545,915
VCC_DCDC: C9.1 C13.1 C16.1 D10.1 L2.2 R16.2 | length 549.7
  Bottom Layer w40: v1(375,725) v1(375,685) v1(375,645) 375,455 495,335 v1(495,305) v1(495,265) v1(495,225)
VCC_STLINK: D9.2 D12.1 JLINK1.4 | length 167.1
  Top Layer w40: JLINK1.4@2631.18,2317.91 2631.18,2243.82 ; D9.2@2645,2230 2631.18,2243.82 ; D12.1@2700,2255 2642.36,2255 2631.18,2243.82
VCC_USART: D16.1 USART1.1 | length 208.7
  Top Layer w20: D16.1@2990,2235 3035.81,2235 3118.51,2152.3 3118.51,2130.59 3120.31,2128.8 USART1.1@3142.01,2128.8
VDD: C29.1 C30.1 C41.1 L5.1 U9.12 VDD.2 | length 732.1
  Top Layer w20: v3(2025,1025) 2025,1215 2040.59,1230.59 C30.1@2086.77,1230.59 C29.1@2147.95,1230.59 ; v1(2165,1365) 2165,1315 2147.95,1297.95 C29.1@2147.95,1230.59 ; VDD.2@2220.5,1225 2217.7,1227.8 2150.74,1227.8 C29.1@2147.95,1230.59
  Bottom Layer w10: U9.12@2165,1305 2165,1229.41 C41.1@2169.41,1225
  Bottom Layer w20: v3(2025,1025) 2030,1025 L5.1@2065,990 ; U9.12@2165,1305 v1(2165,1365)
VDDA: C19.1 R22.2 U5.9 | length 254.1
  Top Layer w10: U5.9@2885.95,1457.91 2886.07,1457.79 2886.07,1423.93 2895,1415 2991.19,1415 C19.1@3013.1,1393.1 3045.69,1393.1 R22.2@3079.4,1359.4
VH: C1.2 R3.2 U2.3 U2.5 U2.10 U2.13 | length 1145.8
  Top Layer w10: v1(2565,635) 2859.5,635 2991,503.5 2992.5,503.5 3005,491 R3.2@3005,489.5 3076.09,489.5 C1.2@3085,480.59
  Bottom Layer w10: U2.13@2415,517.52 2415,569.39 2480.61,635 ; U2.3@2460.18,730.74 U2.3@2465,735.56 2465,650.61 2480.61,635 ; U2.10@2565,517.52 v1(2565,635) ; U2.5@2565,735.56 v1(2565,635) ; 2480.61,635 v1(2565,635)
VH_IN: R1.2 R2.1 R3.1 | length 246.6
  Top Layer w10: R1.2@3005,270.5 3045,270.5 ; R3.1@3005,420.5 3005,419 3045,379 3045,270.5 ; R2.1@3085,270.5 3045,270.5
VREF: *1.1 *2.1 *3.1 R10.2 R35.1 U4.1 | length 1629.3
  POWER w10: v1(1835,1455) v1(1835,1595) 1866.82,1595 1935,1663.18 1935,1864.27 v1(1955.73,1885)
  Bottom Layer w10: *1.1@1745,1760.59 1742.13,1757.72 1717.72,1757.72 1705,1745 1705,1675 1715,1665 1775,1665 1803.66,1636.34 1803.66,1626.34 v1(1835,1595) ; *2.1@1749.29,1430.59 1759.13,1430.59 1783.54,1455 v1(1835,1455) 1885,1405 1885,1268.23 ; R10.2@1785,1149.5 1785,1189.73 1802.4,1207.13 U4.1@1802.4,1216.38 1802.4,1225.63 1845,1268.23 1885,1268.23 ; v1(1955.73,1885) 1966.46,1885 1990.87,1909.41 *3.1@2000.71,1909.41 ; R35.1@2055,1080.5 2055,1082 2042.5,1094.5 2041,1094.5 2020.5,1115 1945,1115 1925,1135 1925,1228.23 1885,1268.23
pads on no net: *.12 D15.7 P1.1 P2.1 P3.1 P4.1 U2.7 U2.8 U2.14 U4.3 U5.1 U5.3 U5.4 U5.6 U5.28 U5.33 U8.4 U9.9
copper on no net:
  other v1: 1255,362.84 1286.42,362.84 1315,362.84
  other v2: 334.69,191.5 3248.08,191.5 268.59,218.91 400.8,218.91 3181.98,218.91 3314.18,218.91 241.19,285.01 428.2,285.01 3154.57,285.01 3341.58,285.01 268.59,351.11 400.8,351.11 3181.98,351.11 3314.18,351.11 334.69,378.51 3248.08,378.51 334.69,2317.49 3248.08,2317.49 268.59,2344.89 400.8,2344.89 3181.98,2344.89 3314.18,2344.89 241.19,2410.99 428.2,2410.99 3154.57,2410.99 3341.58,2410.99 268.59,2477.09 400.8,2477.09 3181.98,2477.09 3314.18,2477.09 334.69,2504.5 3248.08,2504.5

## Polygon pours and split planes (outlines as drawn)
no net on Top Layer "TOP-GND" (solid, remove dead copper, pour order 75): 216.89,216.89 216.89,2479.09 cw(c266.89,2479.09) 266.89,2529.09 3316.5,2529.09 cw(c3316.5,2479.09) 3366.5,2479.09 3366.5,216.89 cw(c3316.5,216.89) 3316.5,166.89 266.89,166.89 cw(c266.89,216.89)
GND on Top Layer "Top Layer-No Net2" (solid, pour order 74): 216.89,216.89 216.89,2479.09 cw(c266.89,2479.09) 266.89,2529.09 3316.5,2529.09 cw(c3316.5,2479.09) 3366.5,2479.09 3366.5,216.89 cw(c3316.5,216.89) 3316.5,166.89 266.89,166.89 cw(c266.89,216.89)
VCC_DCDC on Top Layer "Top Layer-VCC_DCDC" (solid, pour order 17): 615,605 555,545 355,545 355,775 615,775
GND on Top Layer "Top Layer-GND" (solid, pour order 8): 794,273 668,273 569,273 569,371 512,428 512,470 274,470 274,549 377,549 385,514 569,514 569,511 747,333 794,333
GND on Top Layer "Bottom Layer-No Net 1" (solid, pour order 63): 1215,445 1215,285 1355,285 1355,445
GND on Top Layer "Top Layer-GND 4" (solid, pour order 69): 1245,1285 1435,1285 1455,1265 1505,1265 1505,1245 1450.98,1245 1405,1195 1245,1195
MCU3V3 on Top Layer "Top Layer-MCU3V3" (solid, pour order 71): 1655,1275 1655,1345 1695,1385 1755,1385 1815,1325 1815,1275
GND on Top Layer "Top Layer-GND 3" (solid, pour order 65): 2465,295 2465,205 2785,205 2835,255 2945,255 2955,265 2955,295 2895,295 2885,285 2835,285 2825,275 2595,275 2575,295
GND on Top Layer "TOP_L_MOS_GND" (solid, pour order 49): 942.77,1865 912.77,1890 912.77,1910 937.77,1910 939.77,1940 967.77,1940 967.77,1865
VCC5V on Top Layer "Top Layer-VCC5V" (solid, pour order 59): 455,835 476.82,896.82 525,945 605,945 635,915 635,825 605,795 495,795 465,825
GND on Top Layer "Top Layer-GND 1" (solid, pour order 55): 515,2235 515,2175 625,2175 625,2235
GND on Top Layer "Top Layer-GND 2" (solid, pour order 53): 1065,1895 1065,1805 1155,1805 1155,1895
no net on Top Layer "Top Layer-No Net 1" (solid, pour order 51): 995,1895
GND on Top Layer "TOP_L_MOS_GND" (solid, pour order 47): 942.77,1591.67 912.77,1616.67 912.77,1636.67 937.77,1636.67 939.77,1666.67 967.77,1666.67 967.77,1591.67
GND on Top Layer "TOP_L_MOS_GND" (solid, pour order 45): 942.77,1318.33 912.77,1343.33 912.77,1363.33 937.77,1363.33 939.77,1393.33 967.77,1393.33 967.77,1318.33
GND on Top Layer "TOP_L_MOS_GND" (solid, pour order 43): 942.77,1045 912.77,1070 912.77,1090 937.77,1090 939.77,1120 967.77,1120 967.77,1045
GND on Top Layer "TOP_L_MOS_GND" (solid, pour order 41): 667.23,1045 637.23,1070 637.23,1090 662.23,1090 664.23,1120 692.23,1120 692.23,1045
GND on Top Layer "TOP_L_MOS_GND" (solid, pour order 0): 667.23,1318.33 637.23,1343.33 637.23,1363.33 662.23,1363.33 664.23,1393.33 692.23,1393.33 692.23,1318.33
GND on Top Layer "TOP_L_MOS_GND" (solid, pour order 39): 667.23,1591.67 637.23,1616.67 637.23,1636.67 662.23,1636.67 664.23,1666.67 692.23,1666.67 692.23,1591.67
GND on Top Layer "TOP_L_MOS_GND" (solid, pour order 37): 667.23,1865 637.23,1890 637.23,1910 662.23,1910 664.23,1940 692.23,1940 692.23,1865
GND on Top Layer "TOP_L_MOS_GND" (solid, pour order 35): 805,1045 775,1070 775,1090 800,1090 802,1120 830,1120 830,1045
GND on Top Layer "TOP_L_MOS_GND" (solid, pour order 33): 805,1318.33 775,1343.33 775,1363.33 800,1363.33 802,1393.33 830,1393.33 830,1318.33
GND on Top Layer "TOP_L_MOS_GND" (solid, pour order 31): 805,1591.67 775,1616.67 775,1636.67 800,1636.67 802,1666.67 830,1666.67 830,1591.67
no net on Top Layer "Top Layer-No Net 2" (solid, pour order 29): 805,1045 775,1070 775,1090 800,1090 802,1120 830,1120 830,1045
no net on Top Layer "Top Layer-No Net 3" (solid, pour order 27): 805,1318.33 775,1343.33 775,1363.33 800,1363.33 802,1393.33 830,1393.33 830,1318.33
no net on Top Layer "Top Layer-No Net 4" (solid, pour order 25): 805,1591.67 775,1616.67 775,1636.67 800,1636.67 802,1666.67 830,1666.67 830,1591.67
no net on Top Layer "Top Layer-No Net 5" (solid, pour order 23): 645,1935 450,1935
no net on Top Layer "Top Layer-No Net 6" (solid, pour order 21): 555,1935
GND on Top Layer "TOP_L_MOS_GND" (solid, pour order 19): 805,1865 775,1890 775,1910 800,1910 802,1940 830,1940 830,1865
VCC_DCDC on Top Layer "Top Layer-VCC_DCDC 1" (solid, pour order 14): 475,325 475,195 555,195 555,325
NetC9_2 on Top Layer "Top Layer-NetC9_2" (solid, pour order 2): 690,202 575,202 575,307 615,347 615,415 629,415 630,414 630,258 651,237 690,237
no net on Top Layer "Top Layer-No Net" (solid, pour order 10): 581,313
24V_IN on Top Layer "Top Layer-24V_IN" (solid, pour order 6): 691,511 691,466 695,462 746,462 844,364 844,328 944,328 944,387 820,511
GND on Bottom Layer "Top Layer-No Net1" (solid, pour order 73): 216.89,216.89 216.89,2479.09 cw(c266.89,2479.09) 266.89,2529.09 3316.5,2529.09 cw(c3316.5,2479.09) 3366.5,2479.09 3366.5,216.89 cw(c3316.5,216.89) 3316.5,166.89 266.89,166.89 cw(c266.89,216.89)
GND on Bottom Layer "Bottom Layer-No Net" (solid, pour order 12): 525,545
VCC5V on POWER "POWER-VCC5V" (solid, pour order 61): 475,895 575,795 605,795 655,845 655,925 605,975 475,975
GND on GND (split plane): 271 vertices, not listed, extent 236.94,186.94 3346.45,2509.05
GND on GND (split plane): 2299.57,1069.68 2304.05,1068.78 2308.38,1067.31 2312.49,1065.29 2316.29,1062.75 2319.73,1059.73 2322.75,1056.29 2325.29,1052.49 2327.31,1048.38 2328.78,1044.05 2329.68,1039.57 2329.96,1035.28 2329.9,1035 2329.9,925 2329.96,924.73 2329.67,921.09 2328.75,917.28 2327.25,913.66 2325.21,910.32 2322.66,907.34 2319.68,904.79 2316.34,902.75 2312.72,901.25 2308.91,900.33 2305.27,900.04 2305,900.1 2205,900.1 2204.73,900.04 2201.09,900.33 2197.28,901.25 2193.66,902.75 2190.32,904.79 2187.34,907.34 2184.79,910.32 2182.75,913.66 2181.25,917.28 2180.33,921.09 2180.04,924.73 2180.1,925 2180.1,1045 2180.04,1045.27 2180.33,1048.91 2181.25,1052.72 2182.75,1056.34 2184.79,1059.68 2187.34,1062.66 2190.32,1065.21 2193.66,1067.25 2197.28,1068.75 2201.09,1069.67 2204.73,1069.96 2205,1069.9 2295,1069.9 2295.28,1069.96
GND on GND (split plane): 2780,1194.9 2889.9,1194.9 2889.9,1085 2889.96,1084.73 2889.67,1081.09 2888.75,1077.28 2887.25,1073.66 2885.21,1070.32 2882.66,1067.34 2879.68,1064.79 2876.34,1062.75 2872.72,1061.25 2868.91,1060.33 2865.27,1060.04 2865,1060.1 2785,1060.1 2784.68,1060.03 2781.1,1060.39 2777.35,1061.53 2773.89,1063.37 2770.86,1065.86 2768.37,1068.89 2766.53,1072.35 2765.39,1076.1 2765.03,1079.68 2765.1,1080 2765.1,1180 2765.05,1180.24 2765.32,1182.92 2766.17,1185.73 2767.55,1188.32 2769.41,1190.59 2771.68,1192.45 2774.27,1193.83 2777.08,1194.68 2779.76,1194.95

## Other copper
Top Layer:
  pour cut-out: 2800,1210 2795,1215 2705,1215 2680,1190 2680,1060 2700,1040 2900,1040 2925,1065 2925,1190 2895,1220 2860,1220
  pour cut-out: 1247.55,2160.72 1247.55,1679.28 1845.93,1679.28 1838.71,1686.49 1838.71,2165.55
  pour cut-out: 1247.55,2160.72
  pour cut-out: 2923.17,1143.75
Bottom Layer:
  pour cut-out: 2166.63,1076.63 2135,1045 2135,940 2180,895 2375,895 2405,925 2405,1055 2380,1080 2376.63,1076.63
GND (plane layer: these items are gaps in the copper):
  lines w10: 2894.43,1198.3 ccw(c2892.73,1198.3) 2892.73,1200 2780,1200 ccw(c2780,1180) 2760,1180 2760,1080 ccw(c2785,1080) 2785,1055 2865,1055 ccw(c2865,1085) 2895,1085 2895,1198.3 ; 3115,1635 3115,1395 cw(c3065,1395) 3065,1345 2585,1345 cw(c2585,1395) 2535,1395 2535,1875 cw(c2585,1875) 2585,1925 3065,1925 cw(c3065,1875) 3115,1875 3115,1705 ; 2175,925 ccw(c2205,925) 2205,895 2305,895 ccw(c2305,925) 2335,925 2335,1035 ccw(c2295,1035) 2295,1075 2265,1075 2205,1075 ccw(c2205,1045) 2175,1045 2175,925
  lines w20: 1105,345 ccw(c1105,390) 1150,390 1150,1035 cw(c1170,1035) 1170,1055 ccw(c1170,1090) 1205,1090 1205,1235 ccw(c1180,1235) 1180,1260 cw(c1180,1310) 1130,1310 1130,1540 cw(c1180,1540) 1180,1590 1200,1590 ccw(c1200,1640) 1250,1640 1250,2505

## Silkscreen, mask and mechanical layers (free items; w line width, h text height)
Top Overlay:
  text "无人机分电板V2" at 500.91,920.91 h100
  text "2023" at 682,831 h100
Mechanical 1:
  circle w50: c335,2410.98 r51.18
  circle w50: c3248.39,2410.98 r51.18
  circle w50: c3248.39,285 r51.18
  circle w50: c335,285 r51.18
  lines w10: 216.89,216.89 ccw(c266.89,216.89) 266.89,166.89 3316.5,166.89 ccw(c3316.5,216.89) 3366.5,216.89 3366.5,2479.09 ccw(c3316.5,2479.09) 3316.5,2529.09 266.89,2529.09 ccw(c266.89,2479.09) 216.89,2479.09 216.89,216.89
Drill Drawing:
  text ".Legend" at 3481,2377 h60

## Text inside footprints (layer, text, board x,y; h text height)
BUZZER1: Top Overlay "+" at 809.61,2341.51 h32.69
SW3: Top Overlay "ON" at 2335.64,321.7 h15.33 r180; Top Overlay "1" at 2266.46,538.31 h15.44; Top Overlay "2" at 2166.46,538.31 h15.44